# Altium PCB MCU098_MSPM0G3507_PCB.PcbDoc (part 4 of 5)
Units mil, origin at the board's own origin, x right, y up, seen from the top; angles counter-clockwise.
Board outline 2310.03 x 4205.03 mil, 4 copper layers (Top Layer, VCC Layer, GND Layer, Bottom Layer), stack 62.4 mil thick; 260 components, 182 nets, 835 pads, 237 vias.
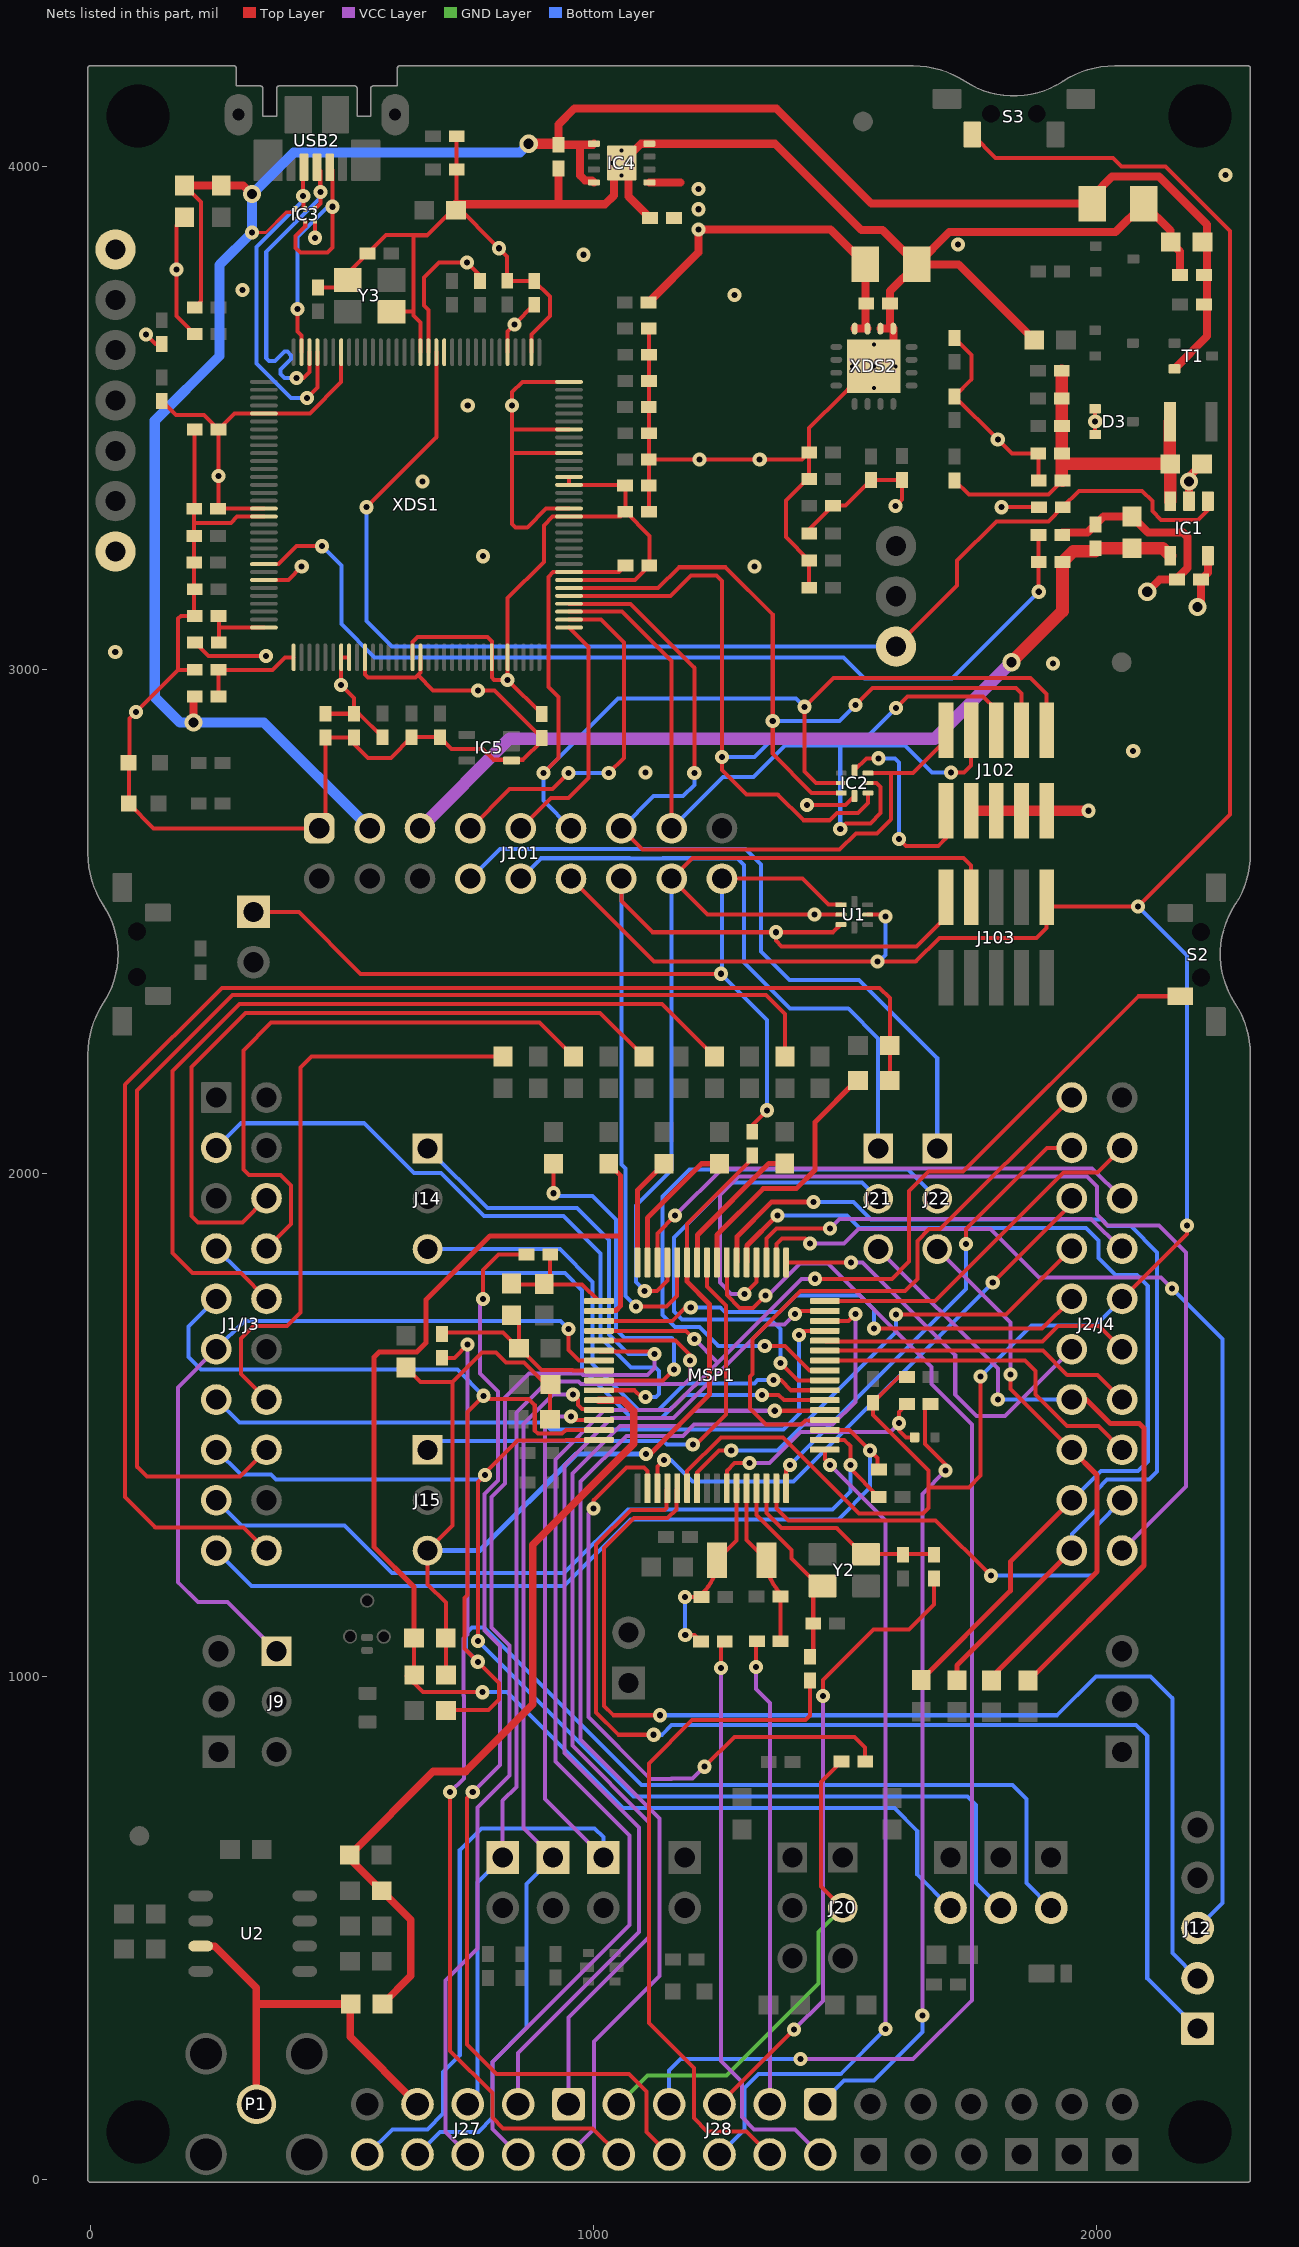
[diagram p5: the nets of this part, all layers, seen from the top]

## Via types
v1: diameter 28, hole 12, Top Layer to Bottom Layer, 211 vias
v2: diameter 36, hole 20, Top Layer to Bottom Layer, 17 vias
v3: diameter 19.68, hole 7.87, Top Layer to Bottom Layer, 9 vias

## Nets (pads, with @x,y where several pads share a name; then routed paths per layer and width w, separated by ;. In a path a pad name is that pad's centre, name@x,y a point inside that pad or via, vN(x,y) a via of type N, cw(c..) or ccw(c..) an arc to the next point about the centre after c; other vN are vias at no path point) (continued)
PA1: MSP1.34 R19.1 | length 1278.6
  Top Layer w8: v1(999.96,1333.33) 999.96,1349.91 1065.04,1414.99 1078.33,1414.99 1078.57,1415.23 1100.26,1415.23 1107.05,1408.44 MSP1.34@1107.05,1373.59 ; v1(1220,820.5) 1279.5,880 1518,880 1539.62,858.38 R19.1@1539.62,830.5
  VCC Layer w8: v1(999.96,1333.33) 990,1323.36 990,919 1112.5,796.5 1154.63,796.5 1154.75,796.62 1196.12,796.62 v1(1220,820.5)
PA1-: J20.2 J28.9 R19.2 | length 991.2
  Top Layer w8: R19.2@1492.38,830.5 1452,790.12 1452,582.88 J20.2@1494.88,540
  GND Layer w8: J28.9@1050,150 1107,207 1264,207 1447,390 1447,492.12 J20.2@1494.88,540
PA2-: J28.1 R9.1 | length 1579
  Top Layer w8: R9.1@1669.62,1541 1658.83,1530.2 1658.83,1461.99 1699.39,1421.43 v1(1699.39,1409)
  VCC Layer w8: v1(1653.02,326.02) 1653.02,1362.63 v1(1699.39,1409)
  Bottom Layer w8: J28.1@1470,170 J28.1@1450,150 1450.8,150 1497.8,197 1557,197 1653.02,293.02 v1(1653.02,326.02)
PA2_ROSC: MSP1.42 R8.1 R9.2 | length 512.1
  Top Layer w8: MSP1.42@1264.53,1373.59 1264.53,1408.53 1280,1424 v1(1310,1424) ; R9.2@1622.38,1541 1607,1525.62 v1(1607,1503) 1607,1489 1621,1475 R8.1@1637.82,1475 R8.1@1638.38,1475
  VCC Layer w8: v1(1310,1424) 1349,1424 1411,1486 1590,1486 v1(1607,1503)
PA3-: J28.2 R10.1 | length 1151.8
  Top Layer w8: v1(1253.03,1017) 1253.03,1060.64 1252.65,1061.02 R10.1@1260.62,1069
  VCC Layer w8: v1(1253.03,1017) 1253.03,236.45 1252.65,236.06 1294.35,194.35 1294.35,124.65 1319,100 1400,100 J28.2@1450,50
PA3_LFXIN: C9.2 MSP1.43 R10.2 Y1.2 | length 390.3
  Top Layer w8: v1(1181.65,1158) C9.2@1214.38,1158 ; v1(1182,1082) 1200.38,1082 R10.2@1213.38,1069 ; C9.2@1208.26,1158.65 ccw(c1155.34,1231) Y1.2@1244.98,1231 1284.21,1270.23 MSP1.43@1284.21,1373.59 MSP1.43@1285.4,1372.4
  Bottom Layer w8: v1(1181.65,1158) 1182,1157.65 v1(1182,1082)
PA4-: J28.3 R11.1 | length 935.8
  Top Layer w8: v1(1322.9,1019) 1322.9,1068.27 R11.1@1324.38,1069.75
  VCC Layer w8: v1(1322.9,1019) 1322.9,974.48 1350,947.38 J28.3@1350,150
  Bottom Layer w8: J28.3@1347,153 J28.3@1350,150
PA4_LFXOUT: C11.2 MSP1.44 R11.2 Y1.1 | length 330.5
  Top Layer w8: MSP1.44@1303.9,1373.59 1303.9,1270.51 Y1.1@1343.4,1231 ccw(c1434.2,1231) C11.2@1378.31,1159.45 ; C11.2@1370.96,1158.65 1370.96,1070.41 R11.2@1371.62,1069.75
PA5-: J28.4 R15.1 | length 1351.7
  Top Layer w8: J28.4@1350,50 1304,96 1225.58,96 1199,122.58 1199,222 1109.62,311.38 1109.62,827.19 1195.43,913 1420.58,913 1430,922.42 R15.1@1430,991.63
PA5_HFXIN: C10.2 MSP1.45 R15.2 Y2.3 | length 394.5
  Top Layer w8: MSP1.45@1323.58,1373.59 1323.58,1320.29 1393,1250.88 1393,1234.33 1446.82,1180.5 1448.05,1180.5 1436.38,1168.83 C10.2@1436.38,1105 1436.38,1045.25 R15.2@1430,1038.87
PA6-: J28.5 R17.1 | length 1262.3
  Top Layer w8: J28.5@1250,150 v1(1398,298) ; v1(1456,961) 1456,993 1556.25,1093.25 1626.75,1093.25 1676.38,1142.88 R17.1@1676.38,1194.38
  VCC Layer w8: v1(1398,298) 1455.35,355.35 1455.35,960.35 v1(1456,961)
PA6_HFXOUT: C12.2 MSP1.46 R17.2 Y2.1 | length 416.4
  Top Layer w8: MSP1.46@1343.27,1373.59 1343.27,1324.73 1372.88,1295.12 1483.04,1295.12 1534.66,1243.5 1674.5,1243.5 R17.2@1676.38,1241.62
PA7_CLK-OUT: J28.6 MSP1.49 | length 1682.5
  Top Layer w8: MSP1.49@1459.41,1450.36 1459.41,1430.59 v1(1470,1420)
  VCC Layer w8: v1(1470,1420) 1580,1310 v1(1580,299)
  Bottom Layer w8: J28.6@1250,50 1300,100 1300,182 1328,210 1491,210 v1(1580,299)
PA8_UART1-TX: J1/J3.4 MSP1.54 | length 1463.6
  Top Layer w8: v1(1334.84,1559.36) 1367.56,1559.36 1378.12,1548.79 MSP1.54@1459.41,1548.79
  Bottom Layer w8: J1/J3.4@250,1850 299,1801 943.19,1801 977.23,1766.97 977.23,1611.32 1075.32,1513.23 1135.02,1513.23 1181.14,1559.36 v1(1334.84,1559.36)
PA9_UART1-RX: J14.3 MSP1.55 | length 1053.4
  Top Layer w8: v1(1357.4,1588.56) 1372.09,1588.56 1392.17,1568.47 MSP1.55@1459.41,1568.47 MSP1.55@1457.5,1566.57
  Bottom Layer w8: J14.3@670,1849 933,1849 998,1784 998,1620.43 1089.33,1529.1 1128.44,1529.1 1181.34,1582 1319.47,1582 1326.03,1588.56 v1(1357.4,1588.56)
PA10_UART0-TX: J21.2 MSP1.56 | length 1006
  Top Layer w8: v1(1371.1,1623) 1405.94,1588.16 MSP1.56@1459.41,1588.16
  Bottom Layer w8: v1(1371.1,1623) 1371.1,1689.75 1351.84,1709 1175.85,1709 1160,1724.85 1160,1871.97 1269.03,1981 1533.39,1981 J21.2@1565.39,1949
PA10_UART0-TX_BP: J2/J4.34 J21.3 R62.2 | length 1299.4
  Top Layer w10: R62.2@1870.5,997.5 2093.39,1220.39 2093.39,1493.28 2084.66,1502 2026.83,1502 1978.83,1550 J2/J4.34@1950,1550
  VCC Layer w8: J21.3@1565.39,1849 1803,1611.39 v1(1803,1550)
  Bottom Layer w8: v1(1803,1550) J2/J4.34@1950,1550
PA10_UART0-TX_XDS: J21.1 J101.10 | length 1208.3
  Bottom Layer w8: J101.10@855.36,2585 J101.10@855,2585 895.51,2625.51 1071.78,2625.51 1072.21,2625.08 1137.79,2625.08 1138.22,2625.51 1285.49,2625.51 1299,2612 1299,2418 1390,2327 1505.91,2327 1565.39,2267.52 J21.1@1565.39,2049
PA11_UART0-RX: J22.2 MSP1.57 | length 1195.9
  Top Layer w8: v1(1340,1656.33) 1380.58,1656.33 1429.06,1607.84 MSP1.57@1459.41,1607.84 MSP1.57@1460.44,1608.87
  Bottom Layer w8: v1(1340,1656.33) 1247.61,1656.33 1209.94,1694 1161.41,1694 1137.28,1718.13 1137.28,1953.27 1190.69,2006.68 1625.04,2006.68 J22.2@1682.72,1949
PA11_UART0-RX_BP: J2/J4.33 J22.3 R63.2 | length 1075.7
  Top Layer w8: v1(1828.25,1599.89) 1828.25,1571.09 1949.34,1450 J2/J4.33@1950,1450
  Top Layer w10: R63.2@1790.84,991.75 1790.84,998.84 2000,1208 2000,1400 J2/J4.33@1950,1450
  VCC Layer w8: J22.3@1682.72,1849 1828.25,1703.47 v1(1828.25,1599.89)
PA11_UART0-RX_XDS: J22.1 J101.8 | length 1404.2
  Bottom Layer w8: J101.8@755,2585 813.84,2643.84 1301.67,2643.84 1332.87,2612.64 1332.87,2440.6 1389.62,2383.85 1527.08,2383.85 1682.72,2228.2 J22.1@1682.72,2049
PA12_CAN-TX: J2/J4.32 MSP1.5 R64.2 | length 1946.6
  Top Layer w10: MSP1.5@1303.9,1822.41 1304.8,1823.32 1304.8,1856.16 1364.64,1916 v1(1365,1916) ; R64.2@1650.84,992.75 1828,1169.91 1828,1228 J2/J4.32@1950,1350
  Bottom Layer w8: v1(1365,1916) 1503.25,1916 1528.4,1890.86 1978.74,1890.86 2003.52,1866.07 2003.52,1831.21 2036.9,1797.83 2079.21,1797.83 2101,1776.03 2101,1427 2081.63,1407.63 2007.63,1407.63 J2/J4.32@1950,1350
PA13_CAN-RX: J2/J4.31 MSP1.6 R65.2 | length 2020.6
  Top Layer w10: MSP1.6@1284.21,1822.41 1285.12,1823.31 1285.12,1874.12 1353.87,1942.87 1436.38,1942.87 v1(1437.13,1942.13) ; R65.2@1721.84,992.25 1721.84,1021.84 J2/J4.31@1950,1250
  Bottom Layer w8: v1(1437.13,1942.13) 1516.36,1942.13 1551.04,1907.44 2009.76,1907.44 2022.36,1894.84 2067.38,1894.84 2119.69,1842.53 2119.69,1407 2103.69,1391 2020.36,1391 2000,1370.64 2000,1332.89 1950,1282.89 J2/J4.31@1950,1250
PA14_TIMH0-C0: J28.7 MSP1.7 | length 2626.2
  Top Layer w8: MSP1.7@1264.53,1822.41 1264.53,1757.47 1290,1732 1316.83,1732 v1(1341.69,1756.86) v1@1341.69,1751.92
  VCC Layer w8: v1(1341.69,1756.86) 1346.64,1756.86 1409.78,1820 1465.67,1820 1671,1614.67 1671,1581 1751.48,1500.52 1751.48,356.48 1635,240 v1(1410.76,240)
  Bottom Layer w8: J28.7@1150,150 1150,217 1173,240 v1(1410.76,240)
PA15-_DAC-OUT: C45.1 J1/J3.30 R55.2 | length 2915.9
  Top Layer w8: J1/J3.30@350,1250 304,1296 129,1296 69,1356 69,2175.5 261.31,2367.81 1568.19,2367.81 1588.53,2347.47 C45.1@1588.53,2253.53 1588.53,2184.09 R55.2@1588.19,2183.75
PA15_DAC-OUT: MSP1.8 R55.1 | length 517.5
  Top Layer w10: MSP1.8@1244.84,1822.41 1244.84,1876.84 1337,1969 1402.68,1969 1439.73,2006.05 1439.73,2101 1522.48,2183.75 R55.1@1525.19,2183.75
PA16_OPA1-OUT_ADC1.1: J15.1 MSP1.9 | length 947.7
  Top Layer w8: v1(1197,1460.41) 1203.17,1460.41 1262.72,1519.96 1262.72,1736.83 1225.16,1774.39 MSP1.9@1225.16,1822.41
  Bottom Layer w8: J15.1@670,1450 690,1470 692.13,1467.87 1138.22,1467.87 1145.68,1460.41 v1(1197,1460.41)
PA17-_ADC1.2: J1/J3.28 R81.1 | length 2500.1
  Top Layer w8: J1/J3.28@350,1450 297.21,1397.21 112.29,1397.21 93,1416.5 93,2164 282.82,2353.81 1342.19,2353.81 1380,2316 R81.1@1380,2231.5
PA17_OPA1-IN-_ADC1.2: MSP1.10 R82.2 | length 287.4
  Top Layer w10: MSP1.10@1205.47,1822.41 1206.38,1823.32 1206.38,1877.02 1348.62,2019.25 R82.2@1379.84,2019.25
PA18-: J8.1 J101.18 R23.1 U1.5 | length 1791.5
  Top Layer w8: J8.1@324.12,2518.97 414.28,2518.97 537.25,2396 v1(1253.01,2396) ; J101.18@1255,2585 1414.56,2585 1466.39,2533.17 U1.5@1491.35,2533.17 ; R23.1@1315.24,2082.16 1315.24,2095.31 v1(1344.68,2124.75)
  Bottom Layer w8: J101.18@1255,2585 1255,2397.99 v1(1253.01,2396) 1344.68,2304.33 v1(1344.68,2124.75)
PA18_OPA1-IN+_ADC1.3_GPAMP-IN-: C46.1 J15.3 MSP1.11 R23.2 R58.2 R61.1 R66.2 R67.2 | length 2273.1
  Top Layer w8: R58.2@627,1613.81 656.12,1584.69 720,1584.69 ; R61.1@706.48,1003.04 C46.1@706.48,1076.28 ; C46.1@706.48,1076.72 706.48,1146.52 670,1183 J15.3@670,1250 720,1300 720,1520.81 720,1584.69 ; R66.2@914.5,1512 R66.2@913.5,1511 913.5,1579 R67.2@914.5,1580 905.16,1580 861.86,1623.3 825.91,1623.3 806.18,1643.03 778.34,1643.03 720,1584.69 ; MSP1.11@1185.79,1822.41 1185.79,1899.11 1315.24,2028.56 R23.2@1315.24,2034.92
  Top Layer w10: v1(1104,1442) 1112.31,1442 1230,1559.69 1230,1740 1185.79,1784.21 MSP1.11@1185.79,1822.41
  Bottom Layer w10: J15.3@670,1250 774,1250 966,1442 v1(1104,1442)
PA19_SWDIO: J101.14 J103.2 MSP1.12 U1.7 | length 1955
  Top Layer w8: J101.14@1055,2585 1055,2540.68 1117.18,2478.5 v1(1362,2478.5) ; v1(1084,1734.69) 1144.69,1734.69 1166.1,1756.1 MSP1.12@1166.1,1822.41 ; U1.7@1491.35,2493.8 1476.05,2478.5 v1(1362,2478.5) ; J103.2@1700,2548.12 1700,2509 1641.5,2450.5 1373.5,2450.5 1362,2462 v1(1362,2478.5)
  Bottom Layer w8: J101.14@1055,2585 1055,2017.39 1063.1,2009.29 1063.1,1755.59 v1(1084,1734.69)
PA20_SWCLK: J101.16 J103.4 MSP1.13 U1.6 | length 1993
  Top Layer w8: v1(1101.5,1765.53) 1125.53,1765.53 1146.42,1786.42 MSP1.13@1146.42,1822.41 ; U1.6@1491.35,2513.49 v1(1439,2513.49) 1226.51,2513.49 J101.16@1155,2585 1196,2626 1735.29,2626 1750,2611.29 J103.4@1750,2548.12
  Bottom Layer w8: v1(1101.5,1765.53) 1083.89,1783.15 1083.89,1935.14 1155,2006.25 J101.16@1155,2585
PA21-: J28.8 R20.1 | length 2245.6
  Top Layer w8: v1(759.86,770) 748,758.14 748,269 807.34,209.66 1070.65,209.66 1105,175.31 1105,95 J28.8@1150,50 ; v1(780,1750.03) 780,1806.97 811.03,1838 R20.1@866.42,1838
  VCC Layer w8: v1(759.86,770) 814,824.14 814,1060.15 783,1091.15 783,1362.41 809.87,1389.28 809.87,1565.72 774.05,1601.54 774.05,1744.08 v1(780,1750.03)
PA21_VREF-: C8.2 MSP1.17 R3.2 R20.2 | length 232.6
  Top Layer w8: C8.2@836.63,1780.5 838.13,1779 977.23,1779 MSP1.17@1010.59,1745.64 ; R3.2@913.66,1793.84 R20.2@913.66,1838
PA22-_ADC0.7: J1/J3.24 R83.1 | length 1197.4
  Top Layer w8: J1/J3.24@350,1850 398.91,1898.91 398.91,1975.01 377.92,1996 315,1996 304,2007 304,2244 359.24,2299.24 892.25,2299.24 R83.1@960,2231.5
PA22_OPA0-OUT_ADC0.7_GPAMP-OUT_COMP2-IN0+: C46.2 J16.2 MSP1.18 R61.2 R84.2 | length 2965
  Top Layer w8: R61.2@628.5,1001.04 661.05,968.5 v1(779,968.5) ; R61.2@643.27,1003.26 C46.2@643.27,1076.5
  Top Layer w10: C46.2@643.27,1076.5 643.27,1177.44 564,1256.7 564,1634.5 574,1644.5 648.64,1644.5 667,1662.86 667,1748.34 793.66,1875.01 1051.99,1875.01 1052.99,1874 ; MSP1.18@1010.59,1725.95 1010.59,1726.86 1044.31,1726.86 1052.99,1735.54 1052.99,1874 ; R84.2@1030,2018.5 1052.99,1995.51 1052.99,1874
  Bottom Layer w8: v1(779,968.5) 828.2,968.5 1058.7,738 1598,738 1643,693 1643,606 J16.2@1709,540
PA23-: J28.10 R22.1 | length 1928.3
  Top Layer w8: R22.1@699,1633.01 723.31,1633.01 v1(749.42,1659.12) ; v1(715,770) 715,256 799,172 799,123.09 820.25,101.84 998.16,101.84 J28.10@1050,50
  VCC Layer w8: v1(715,770) 742.44,797.44 742.44,961.19 741.57,962.06 741.57,1075.31 749.42,1083.15 v1(749.42,1659.12)
PA23_VREF+: C7.1 C8.1 MSP1.24 R22.2 | length 429.5
  Top Layer w8: R22.2@699,1679.62 R22.2@699.32,1679.94 ; R22.2@699,1680.25 701.87,1683.12 820.38,1683.12 C7.1@851.5,1652 ; C8.1@836.63,1717.5 851.5,1702.63 C7.1@851.5,1652 ; C8.1@842,1719.38 C8.1@851.5,1709.87 ; MSP1.24@1010.59,1607.84 958.65,1607.84 957.8,1608.7 896.25,1608.7 852.95,1652 C7.1@851.5,1652
PA24-_ADC0.3: J1/J3.27 R79.1 | length 1179.9
  Top Layer w8: J1/J3.27@350,1550 299.61,1600.39 299.61,1671.35 324.26,1696 391,1696 417.5,1722.5 417.5,2209.5 439.5,2231.5 R79.1@820,2231.5
PA24_OPA0-IN1-_ADC0.3: MSP1.25 R80.2 | length 763.8
  Top Layer w8: v1(920,1959.93) R80.2@920,2018.5 ; MSP1.25@1010.59,1588.16 1070.78,1588.16 1092.24,1588.13 ; 1092.28,1588.16 1138.16,1588.16 v1(1160,1610)
  Bottom Layer w8: v1(920,1959.93) 925.93,1954 998,1954 1044.2,1907.8 1044.2,1720.8 1044.13,1720.72 1044.13,1689.28 1061.11,1672.29 1155.21,1672.29 1160,1667.5 v1(1160,1610)
PA25_OPA0-IN1+_ADC0.2: J1/J3.2 MSP1.26 | length 1375.6
  Top Layer w8: MSP1.26@1010.59,1568.47 1081.53,1568.47 1095,1555 v1(1102.68,1555)
  Bottom Layer w8: J1/J3.2@250,2050 299,2099 543.75,2099 642.75,2000 696.55,2000 782.29,1914.26 940.37,1914.26 1014.07,1840.56 1014.07,1673.25 1063.04,1624.28 1063.57,1624.28 1074.13,1613.72 1123.28,1613.72 1130,1607 1130,1561 1124,1555 v1(1102.68,1555)
PA26_OPA0-IN0+_GPAMP-IN+_COMP0-IN0+: J1/J3.5 J18.2 MSP1.30 R57.1 | length 3414.5
  Top Layer w8: R57.1@692.16,937.39 692.16,933 791,933 812,954 812,986.82 743.05,1055.78 743.05,1156.13 749,1162.08 749,1525 v1(781.5,1557.5) 787.7,1551.3 870.6,1551.3 883,1538.9 883,1488.97 889.67,1482.3 937.32,1482.3 944.76,1489.73 MSP1.30@1010.59,1489.73
  Bottom Layer w8: J1/J3.5@227.51,1750 J1/J3.5@250,1750 195.25,1695.25 195.25,1634.16 219.92,1609.49 729.51,1609.49 v1(781.5,1557.5) ; v1(769.82,1029) 746.21,1052.61 746.21,1084.88 758.33,1097 782.5,1097 1095.5,784 1832,784 1860,756 1860,589 J18.2@1909,540
PA27_OPA0-IN0-_COMP0-IN0-_TIMA2_FAL: J1/J3.8 J17.2 MSP1.31 | length 2505.3
  Top Layer w8: v1(770.21,1070) 770.21,1386.21 v1(784,1400) 784,1403.97 848.33,1468.3 943.12,1468.3 944.87,1470.05 MSP1.31@1010.59,1470.05
  Bottom Layer w8: J1/J3.8@250,1450 299.03,1400.97 358.97,1400.97 368.94,1391 652.45,1391 652.85,1391.4 687.15,1391.4 687.55,1391 775,1391 v1(784,1400) ; v1(770.21,1070) 1079.21,761 1743,761 1760,744 1760,589 J17.2@1809,540
PA28_TIMA2_C0: J2/J4.38 MSP1.35 | length 1128.9
  Top Layer w8: MSP1.35@1126.73,1373.59 1126.73,1416.73 v1(1140,1430) ; v1(1793.04,1782.83) 1950,1939.79 J2/J4.38@1950,1950
  Bottom Layer w8: v1(1140,1430) 1153.62,1430 1196.59,1387.03 1397.24,1387.03 v1(1793.04,1782.83)
PA29_TIMG10_C0: J12.1 MSP1.36 | length 2295.9
  Top Layer w8: v1(1119.38,884) 1049.27,884 1005.13,928.15 1005.13,1261.58 1073.99,1330.44 1140.45,1330.44 1144.51,1334.5 1144.51,1371.69 MSP1.36@1146.42,1373.59
  Bottom Layer w8: v1(1119.38,884) 1136,884 1155,903 1160.62,903 2078,903 2086.65,894.35 2087.4,894.35 2100,881.75 2100,400 J12.1@2200,300
PA30_TIMG10_C1: J12.2 MSP1.37 | length 2295.1
  Top Layer w8: v1(1132,922.75) 1039.73,922.75 1021,941.48 1021,1255 1080.56,1314.56 1147.02,1314.56 1164.2,1331.74 1164.2,1371.68 MSP1.37@1166.1,1373.59
  Bottom Layer w8: v1(1132,922.75) 1920.82,922.75 1998.07,1000 2106.5,1000 2150,956.5 2150,450 J12.2@2200,400
PA31_TIMA2_C1: J2/J4.37 MSP1.39 | length 980.5
  Top Layer w8: MSP1.39@1205.47,1373.59 1205.47,1404.99 1249.48,1449 v1(1273.42,1449) ; v1(1600.5,1719.11) 1819.11,1719.11 J2/J4.37@1950,1850
  Bottom Layer w8: v1(1273.42,1449) 1365,1449 1600.5,1684.5 v1(1600.5,1719.11)
PB0_SPI1-CS2: J2/J4.12 MSP1.47 | length 898.3
  Top Layer w8: MSP1.47@1362.95,1373.59 1362.95,1333.77 1386.72,1310 1679.72,1310 v1(1789.72,1200)
  Bottom Layer w8: v1(1789.72,1200) 1992,1200 2000,1208 2000,1300 J2/J4.12@2050,1350
PB1_TIMA1-C1: J2/J4.39 MSP1.48 | length 941.3
  Top Layer w8: MSP1.48@1382.64,1373.59 1382.64,1412.55 v1(1390,1419.92) ; v1(1739.48,1859) 1739.48,1888.79 1900.69,2050 J2/J4.39@1950,2050
  Bottom Layer w8: v1(1390,1419.92) 1739.48,1769.4 v1(1739.48,1859) v1@1739.48,1860
PB2_I2C1-SCL: J1/J3.9 MSP1.50 R59.2 | length 1620.2
  Top Layer w8: MSP1.50@1459.41,1470.05 1497.95,1470.05 1510,1458 v1(1510,1419.92) 1510,1412.72 R59.2@1566.38,1356.35
  Bottom Layer w8: J1/J3.9@250,1350 300,1300 504.84,1300 599.84,1205 941.52,1205 1068.52,1332 1474.28,1332 1510,1367.72 v1(1510,1419.92)
PB3_I2C1-SDA: J1/J3.10 MSP1.51 R60.2 | length 1630.6
  Top Layer w8: MSP1.51@1459.41,1489.73 1508.62,1489.73 v1(1549.35,1449) 1564.09,1434.26 R60.2@1564.09,1414.34
  Bottom Layer w8: J1/J3.10@250,1250 320.13,1179.87 940.96,1179.87 1073.18,1312.09 1486.09,1312.09 1549.35,1375.35 v1(1549.35,1449)
PB4_TIMA1-C0: J2/J4.40 MSP1.52 | length 1183
  Top Layer w8: MSP1.52@1459.41,1509.42 1458.62,1508.63 1421,1508.63 1412.37,1500 1342.85,1500 1310.84,1532.02 1310.84,1595.49 1316,1600.65 1316,1669.98 1411.29,1765.28 1618.78,1765.28 1643.19,1789.69 1643.19,1865.37 1666.35,1888.53 1688.53,1888.53 J2/J4.40@1950,2150
PB5: J27.1 MSP1.53 | length 1936
  Top Layer w8: v1(1359.9,1527.77) 1458.08,1527.77 MSP1.53@1459.41,1529.1
  VCC Layer w8: J27.1@950,150 950,322 1109.96,481.96 1109.96,710.04 957.76,862.24 957.76,1402.76 1052.35,1497.35 1167.65,1497.35 1198.08,1527.77 v1(1359.9,1527.77)
PB6_SPI1-CS0: J2/J4.13 MSP1.58 | length 691.7
  Top Layer w8: MSP1.58@1459.41,1627.53 1857.47,1627.53 1878,1607 1878,1560 1941,1497 2003,1497 J2/J4.13@2050,1450
PB7_SPI1-POCI: J2/J4.14 MSP1.59 | length 630.9
  Top Layer w8: MSP1.59@1459.41,1647.21 1892.81,1647.21 1941.02,1599 2001,1599 J2/J4.14@2050,1550
PB8_SPI1-PICO: J2/J4.15 MSP1.60 | length 623.2
  Top Layer w8: MSP1.60@1459.41,1666.9 1461.18,1665.13 1891.63,1665.13 1922.5,1696 2004,1696 J2/J4.15@2050,1650
PB9_SPI1-SCK: J1/J3.7 MSP1.61 | length 1408.9
  Top Layer w8: v1(1408,1678) 1416.58,1686.58 MSP1.61@1459.41,1686.58
  Bottom Layer w8: J1/J3.7@250,1550 296,1504 900.43,1504 913.95,1490.48 1377.48,1490.48 1410,1523 1408,1525 v1(1408,1678)
PB10_TIMG0-C0: J27.2 MSP1.62 | length 2329.7
  Top Layer w8: MSP1.62@1459.41,1706.27 1506.27,1706.27 v1(1520,1720)
  VCC Layer w8: J27.2@950,50 1000.49,100.49 1000.49,274.49 1130.54,404.54 1130.54,717.99 973.63,874.91 973.63,1386.77 1064.86,1478 1177.16,1478 1199.16,1500 1474.9,1500 1520,1545.1 v1(1520,1720)
PB11_TIMG0-C1: J27.3 MSP1.63 | length 2074.6
  Top Layer w8: v1(1399.96,1720) 1405.91,1725.95 MSP1.63@1459.41,1725.95
  VCC Layer w8: J27.3@850,150 850,252.03 1090,492.03 1090,699.52 941.88,847.63 941.88,1419.3 1035.8,1513.22 1158.63,1513.22 1344.44,1699.04 1378.99,1699.04 v1(1399.96,1720)
PB12_TIMA0-C2_TIMA1-FAL: J2/J4.19 MSP1.64 | length 716.7
  Top Layer w8: MSP1.64@1459.41,1745.64 1678.64,1745.64 1934,2001 2001,2001 J2/J4.19@2050,2050
PB13_TIMA0-C3: J2/J4.35 MSP1.1 | length 794.1
  Top Layer w8: MSP1.1@1382.64,1822.41 v1(1511.63,1822.41)
  VCC Layer w8: v1(1511.63,1822.41) 1534.42,1822.41 1718.49,1638.34 1718.49,1560.23 1760.98,1517.74 1817.74,1517.74 J2/J4.35@1950,1650
PB14_TIMG10_IDX: J12.3 MSP1.2 | length 2225.1
  Top Layer w8: MSP1.2@1362.95,1822.41 1362.95,1858.9 1373.92,1869.87 1420.25,1869.87 v1(1430,1860.12)
  VCC Layer w8: v1(1430,1860.12) 1497.66,1860.12 1526.07,1888.53 1788.77,1888.53 1884.91,1792.39 2127.7,1792.39 v1(2149.08,1771)
  Bottom Layer w8: v1(2149.08,1771) 2249.92,1670.16 2249.92,549.92 J12.3@2200,500
PB15_UART2-TX_TIMG1-C0: J2/J4.17 MSP1.3 | length 794.8
  Top Layer w8: MSP1.3@1343.27,1822.41 1343.27,1869.87 1363.52,1890.13 v1(1469.76,1890.13)
  VCC Layer w8: v1(1469.76,1890.13) 1488.63,1909 1988.4,1909 2047.4,1850 J2/J4.17@2050,1850
PB16_UART2-RX_TIMG1-C1: J2/J4.11 MSP1.4 | length 1986
  Top Layer w8: v1(1300,1759.93) 1323.58,1783.51 MSP1.4@1323.58,1822.41
  VCC Layer w8: v1(1300,1759.93) 1273.42,1759.93 1251.22,1782.14 1251.22,1956.22 1288.32,1993.32 1980.09,1993.32 1999.82,1973.59 1999.82,1917.38 2021.03,1896.18 2123.34,1896.18 2177,1842.52 2177,1377 J2/J4.11@2050,1250
PB17_ADC1.4_SPI1-CS1: J2/J4.18 MSP1.14 | length 1059.3
  Top Layer w8: MSP1.14@1126.73,1822.41 1126.73,1880.31 v1(1162,1915.58)
  VCC Layer w8: v1(1162,1915.58) 1255.89,2009.47 1990.53,2009.47 J2/J4.18@2050,1950
PB18-_ADC1.5: J1/J3.25 R75.1 | length 1761.9
  Top Layer w8: J1/J3.25@350,1750 299,1801 203.27,1801 163,1841.27 163,2203 296,2336 1135.5,2336 R75.1@1240,2231.5
PB18_ADC1.5: MSP1.15 R76.2 | length 276.1
  Top Layer w10: MSP1.15@1107.05,1822.41 1107.05,1911.05 1214.5,2018.5 R76.2@1250,2018.5
PB19-_ADC1.6: J1/J3.23 R77.1 | length 1449.8
  Top Layer w8: J1/J3.23@350,1950 302,1902 214,1902 201,1915 201,2211 308.45,2318.45 1013.05,2318.45 R77.1@1100,2231.5
PB19_OPA1-IN+_ADC1.6: MSP1.16 R78.2 | length 217.9
  Top Layer w10: MSP1.16@1087.36,1822.41 1087.36,1965.87 R78.2@1140,2018.5
PB20_TIMA0-C2: J2/J4.36 MSP1.19 | length 1041.6
  Top Layer w8: MSP1.19@1010.59,1706.27 1156.2,1706.27 1182.93,1733 v1(1193,1733) ; v1(1557,1691) 1891,1691 J2/J4.36@1950,1750
  Bottom Layer w8: v1(1193,1733) 1251.58,1733 1260.71,1723.87 1369.18,1723.87 1401.84,1756.54 1529.46,1756.54 1557,1729 v1(1557,1691)
PB21: J27.4 MSP1.20 S2.3 | length 3542.8
  Top Layer w8: MSP1.20@1010.59,1686.58 1183.42,1686.58 v1(1200,1670) ; v1(1440,1790) 1592.89,1790 1626.9,1824.02 1626.9,1964.22 1665.53,2002.84 1734.16,2002.84 2082.65,2351.32 S2.3@2165.44,2351.32
  VCC Layer w8: J27.4@850,50 799,101 799,234 1071,506 1071,684 923.97,831.03 923.97,1430.97 1022.09,1529.09 1152.05,1529.09 1246.98,1624.02 ; v1(1200,1670) 1245.98,1624.02 1246.98,1624.02 ; v1(1440,1790) 1412.96,1790 1246.98,1624.02
PB22: J5.1 J27.5 MSP1.21 | length 2029.8
  Top Layer w8: MSP1.21@1010.59,1666.9 1162.52,1666.9 1191.28,1638.14 v1(1191.28,1628)
  VCC Layer w8: J5.1@819.38,640 819.38,752.88 847.03,780.53 847.03,1524.5 908.4,1585.87 969.72,1585.87 974.69,1580.91 1180.24,1580.91 1191.28,1591.94 v1(1191.28,1628)
  Bottom Layer w8: J27.5@750,150 769.66,169.66 769.66,590.28 J5.1@819.38,640
PB23_TIMA0-FAL: J14.1 J27.6 MSP1.22 | length 2794.6
  Top Layer w8: MSP1.22@1010.59,1647.21 1012.5,1645.31 1115.43,1645.31 v1(1120.58,1640.16)
  VCC Layer w8: J27.6@750,50 705.65,94.35 705.65,168.73 706,169.08 706,395.79 769.38,459.17 769.38,739.47 833.03,803.12 833.03,1060.92 797,1096.95 797,1356.61 823.87,1383.48 823.87,1553.66 871.97,1601.75 976.29,1601.75 979.04,1599 1107.22,1599 1120.58,1612.37 v1(1120.58,1640.16)
  Bottom Layer w8: J14.1@670,2049 788.87,1930.13 966.96,1930.13 1030.2,1866.89 1030.2,1726.59 1030.13,1726.52 1030.13,1679.64 1069.61,1640.16 v1(1120.58,1640.16)
PB24_ADC0.5_COMP1-IN1+: J1/J3.6 J9.1 MSP1.23 | length 1587.9
  Top Layer w8: v1(950,1690) 950,1648.83 971.3,1627.53 MSP1.23@1010.59,1627.53
  VCC Layer w8: J1/J3.6@250,1650 174,1574 174,1187 213.5,1147.5 272.5,1147.5 J9.1@370,1050
  Bottom Layer w8: J1/J3.6@250,1650 306.27,1706.27 933.73,1706.27 v1(950,1690)
PB25-: J27.7 P1.1 R74.1 U2.3 | length 819.1
  Top Layer w15: U2.3@219.32,463.99 247.01,463.99 330,381 330,352 ; P1.1@330,150 330,352 ; R74.1@517.5,349 R74.1@516.41,349 ; J27.7@650,150 516.41,283.59 R74.1@516.41,349 ; 330,352 333,349 R74.1@516.41,349
PB25_ADC0.4_TIMA2-FAL: C47.1 MSP1.27 R72.2 R74.2 | length 1601.5
  Top Layer w15: R74.2@580.5,349 637.01,405.51 637.01,515.98 R72.2@579,573.99 515.51,637.48 C47.1@515.51,644.99 681.52,811 745.48,811 879.45,944.97 879.45,1261.22 1080,1461.76 1080,1527 1058.21,1548.79 MSP1.27@1010.59,1548.79
PB26: J6.1 J27.8 MSP1.28 | length 1826.1
  Top Layer w8: v1(959,1560) 969.19,1549.81 969.19,1539.11 977.29,1531.01 991.09,1531.01 991.09,1529.1 MSP1.28@1010.59,1529.1
  VCC Layer w8: J6.1@919.38,640 861.03,698.35 861.03,1501.88 919.34,1560.19 919.53,1560 v1(959,1560)
  Bottom Layer w8: J27.8@650,50 694.98,94.98 770.89,94.98 799,123.09 799,234 867,302 867,587.62 J6.1@919.38,640
PB27: J7.1 J27.10 MSP1.29 | length 2105.7
  Top Layer w8: v1(955.35,1516.35) 955.35,1514.2 960.13,1509.42 MSP1.29@1010.59,1509.42
  VCC Layer w8: v1(955.35,1516.35) 909.14,1516.35 902.91,1510.12 902.91,756.47 J7.1@1019.38,640
  Bottom Layer w8: J27.10@550,50 600.13,100.13 670,100.13 701,131.13 701,214.21 734,247.21 734,654.62 777.38,698 1002,698 1019.38,680.62 J7.1@1019.38,640
R\S\T\: C6.1 J2/J4.16 J101.12 J103.10 MSP1.38 R2.1 S3.4 U1.2 | length 5908.3
  Top Layer w8: J101.12@955,2585 1120.08,2419.92 1242.99,2419.92 1243.07,2420 v1(1564.09,2420) 1640,2420 1687,2467 1880,2467 1900,2487 J103.10@1900,2530 ; MSP1.38@1185.79,1373.59 1185.79,1407.75 1253.03,1475 1376.69,1475 1527.69,1324 1654.64,1324 1665.49,1334.85 1665.49,1375.35 ; U1.2@1544.5,2513.49 1576.39,2513.49 v1(1579.88,2510) ; C6.1@1622.38,1595 1606.24,1595 R2.1@1555,1543.76 1555,1519.62 1665.49,1409.13 1665.49,1375.35 ; S3.4@1752.32,4063.44 1798.76,4017 2031.55,4017 2048.68,3999.87 2136.13,3999.87 2264.13,3871.87 2264.13,2712.63 v1(2081.5,2530) J103.10@1900,2530 ; v1(1769,1596) 1769,1398.68 1745.67,1375.35 1665.49,1375.35 ; J103.10@1900,2548.12 J103.10@1900,2530 ; J2/J4.16@2050,1750 2179.06,1879.06 v1(2179.06,1895.44)
  Bottom Layer w8: v1(1564.09,2420) 1566.38,2420 1579.88,2433.5 v1(1579.88,2510) ; v1(1769,1596) 1870,1697 1997,1697 J2/J4.16@2050,1750 ; v1(2081.5,2530) 2179.06,2432.44 v1(2179.06,1895.44)
REF_MAIN_LDO: R51.1 R54.2 XDS1.128 | length 143.9
  Top Layer w8: R54.2@254.62,3107 255.24,3106.38 255.24,3086.5 ; R51.1@255.24,3054 255.24,3086.5 ; XDS1.128@344.85,3083.91 257.84,3083.91 255.24,3086.5
REF_TARGET_VCC: R50.1 R53.2 XDS1.120 | length 1915.4
  Top Layer w8: XDS1.120@344.85,3209.89 373.97,3209.89 409.58,3245.5 v1(460,3245.5) ; R53.2@1884,3268 1884,3214.38 R50.1@1884.38,3214 v1(1884.38,3155)
  Bottom Layer w8: v1(460,3245.5) 498.64,3206.86 498.64,3090.77 564.56,3024.85 1496.15,3024.85 1538,2983 1712.38,2983 v1(1884.38,3155)
VBUS_DETECT: R87.2 R88.2 XDS1.1 | length 212.5
  Top Layer w8: R87.2@254.62,2947 R88.2@254.62,3000 361.65,3000 386.5,3024.85 XDS1.1@403.84,3024.85
VCCEN1: IC1.1 R49.2 TP2.1 XDS1.78 | length 2503.4
  Top Layer w8: v1(548.34,3323) 687.37,3462.03 XDS1.78@687.37,3631.15 ; TP2.1@1601,3046 1722,3167 1722,3217 1800,3295 1904,3295 R49.2@1932,3323 1964,3355 2090,3355 2110,3335 2110,3315 2127,3298 2201,3298 2220.4,3317.4 IC1.1@2220.4,3335
  Bottom Layer w8: v1(548.34,3323) 548.34,3096.66 599,3046 TP2.1@1601,3046
VCCEN2: XDS1.77
XDS_DM: IC3.5 USB2.2 XDS1.93 | length 683.3
  Top Layer w8: USB2.2@424.5,3998.28 423,3996.78 v1(423,3941) 423.13,3940.87 423.13,3919.69 IC3.5@427,3915.81 ; v1(430.17,3540.08) 451.15,3561.06 XDS1.93@451.15,3631.15
  Bottom Layer w8: v1(423,3941) 423,3932.88 330.47,3840.34 330.47,3608.66 399.05,3540.08 v1(430.17,3540.08)
XDS_DP: IC3.4 USB2.3 XDS1.94 | length 684.8
  Top Layer w8: v1(410.02,3580) 423.55,3580 435.4,3591.85 XDS1.94@435.4,3631.15 ; IC3.4@446.69,3915.81 457,3926.13 v1(457,3949.4) 456.82,3949.58 456.82,3990.98 455.56,3992.24 449.81,3997.99 USB2.3@450.09,3998.28 USB2.3@454.95,3993.42
  Bottom Layer w8: v1(410.02,3580) 385.64,3580 377.64,3588 377.64,3596.37 399.05,3617.77 399.05,3624.75 391.28,3632.52 385.37,3632.52 366.66,3613.81 355.38,3613.81 349.51,3619.68 349.51,3830.51 457,3938 v1(457,3949.4)
XDS_GND: C13.2 C14.2 C15.2 C16.2 C17.2 C18.2 C19.2 C20.2 C21.2 C22.2 C23.2 C24.2 C25.2 C26.2 C27.2 C28.2 C29.2 C30.2 C31.2 C32.2 C33.2 C34.2 C35.2 C36.2 C37.1 C38.2 C39.2 C40.2 C41.2 C42.2 C43.1 C44.2 C53.2 C54.2 C55.2 C56.2 D3.1 D3.2 IC1.2 IC2.4 IC3.3 IC4.4 IC4.9 IC5.1 J101.1 J102.3 J102.5 J102.7 J102.9 LED101.2 LED102.2 R24.2 R25.2 R26.2 R27.2 R32.1 R37.1 R44.1 R46.1 R49.1 R52.1 R53.1 R54.1 R86.2 R88.1 R90.1 TP4.1 XDS1.10 XDS1.17 XDS1.48 XDS1.55 XDS1.58 XDS1.64 XDS1.66 XDS1.80 XDS1.114 XDS2.13 XDS2.14 XDS2.17 Y3.2 Y3.4 | length 9950.1
  Top Layer w8: C53.2@187,3899.23 171,3883.23 v1(171,3795) 171,3703.38 C13.2@207.38,3667 ; R88.1@207.38,3000 174.5,3000 ; C18.2@207.38,3477.61 207.38,3321 C19.2@206.38,3320 206.38,3292 ; XDS1.114@344.85,3304.38 291.59,3304.38 279.21,3292 206.38,3292 ; v1(446.69,3858.31) IC3.3@446.69,3892.19 ; C30.2@452.72,3759.62 496.82,3759.62 Y3.4@511.69,3774.5 511.69,3787.9 C29.2@550.75,3826.97 587.18,3863.39 642.22,3863.39 ; XDS1.10@545.64,3024.85 545.64,2990.66 551.91,2984.39 645.68,2984.39 650.78,2989.49 ; Y3.2@598.31,3711.5 639.98,3711.5 642.22,3713.74 ; XDS1.17@655.87,3024.85 655.87,2994.58 650.78,2989.49 ; XDS1.80@655.87,3631.15 655.87,3690.2 642.22,3703.85 642.22,3713.74 ; C54.2@728,4060 728,3928.5 R86.2@724.5,3925 ; XDS1.66@876.35,3631.15 876.35,3666.02 913,3702.68 913,3741.62 C14.2@882,3772.62 828,3772.62 828,3821.5 v1(812,3837.5) R86.2@724.5,3925 ; XDS1.48@951.15,3320.13 905.45,3320.13 868.12,3282.79 844.96,3282.79 838,3289.75 838,3431 ; XDS1.55@951.15,3430.36 838.64,3430.36 838,3431 ; XDS1.58@951.15,3477.61 838.61,3477.61 838,3477 ; XDS1.64@951.15,3572.22 858.22,3572.22 838,3552 v1(838,3525) 838,3477 ; C28.2@1109.62,3678 R26.2@1109.62,3522 R32.1@1109.62,3418 ; C15.2@1110.13,3314 1110.13,3365.5 C16.2@1109.62,3366 R32.1@1109.62,3418 ; v1(1423.8,2731.35) 1500.62,2731.35 IC2.4@1518.56,2749.29 ; R46.1@1428.38,3163 C35.2@1428.38,3217 1382,3263.38 1382,3336.5 1424.5,3379 R44.1@1428.38,3379 C34.2@1428.38,3432 ; v3(1557,3603) 1551.41,3603 1505.88,3557.47 1505.88,3557.25 1495.47,3546.83 1495.24,3546.83 1428.38,3479.97 C34.2@1428.38,3432 ; C31.2@1717,3659.24 1751,3625.24 1751,3577.24 R37.1@1717,3543.24 v1(1803,3457.24) 1830.89,3429.35 C42.2@1883.38,3429.35 1884.38,3428.35 C44.2@1884.38,3376 ; v1(1810.75,3323) R49.1@1884.76,3323 ; D3.2@1996.6,3467.41 v1(1996.6,3493) D3.1@1996.6,3518.59 ; 174.5,3000 v1(90.5,2916) 77.59,2903.09 77.59,2815.41 76.47,2814.29 LED102.2@76.47,2734 125.47,2685 J101.1@455,2685 467.5,2697.5 C17.2@467.5,2865.38 C21.2@524,2865.38 524,2853 552,2825 596.99,2825 C26.2@638,2866.01 C27.2@695,2866.01 718.01,2843 779,2843 800.75,2821.25 834.95,2821.25 IC5.1@836.63,2819.57 838.32,2821.25 859.29,2821.25 897,2858.96 C22.2@897,2864.76 802.76,2959 v1(770,2959) 681.27,2959 650.78,2989.49 ; 174.5,3000 174.5,3101.5 180,3107 R54.1@207.38,3107 206.38,3108 C24.2@206.38,3213 C23.2@206.38,3266 206.38,3292 ; 642.22,3713.74 642.22,3863.34 669.23,3863.34 724.5,3918.62 R86.2@724.5,3925 ; 838,3431 838,3477 ; R32.1@1109.62,3418 v1(1210,3418) v1(1330,3418) 1414.38,3418 C34.2@1428.38,3432
  Top Layer w16: R86.2@724.5,3925 930,3925 ; C55.2@930,3995.95 930,3925 ; C56.2@1112.1,3897.58 1069,3940.68 1069,3993.39 IC4.9@1055.61,4006.78 ; v3(1557,3603) 1595.39,3641.39 XDS2.13@1595.39,3677.8 1586,3677.8 ; XDS2.14@1569.8,3677.8 1586,3677.8 ; R52.1@1875.5,3655.41 1725.34,3805.58 C32.2@1642.2,3805.58 ; R53.1@1931.24,3268 1931.24,3273 1981.38,3273 C39.2@1997,3288.62 2012.87,3304.5 C40.2@2070,3304.5 2101.5,3273 2171,3273 2180,3264 2180,3202.39 2159.38,3181.76 C41.2@2159.38,3179 2124,3179 v2(2100,3155) ; C38.2@2165.38,3784 2165.38,3830.99 C37.1@2146.5,3849.87 2146.5,3872.68 C36.2@2093.18,3926 2037.1,3869.92 1706.54,3869.92 C32.2@1642.2,3805.58 ; IC1.2@2183,3335 v2(2183,3374) 2183,3383.5 C43.1@2208.5,3409 ; 930,3925 1022.77,3925 1040.25,3942.49 1040.25,3991.43 IC4.9@1055.61,4006.78 ; IC4.9@1055.61,4006.78 1093.99,4045.17 IC4.4@1110.73,4045.17 1360.63,4045.17 1531.8,3874 1573.77,3874 C32.2@1642.2,3805.58 ; 1586,3677.8 1589,3680.8 C33.2@1589,3728 1589,3752.38 C32.2@1642.2,3805.58
  Top Layer w20: J102.3@1750,2719.88 J102.5@1800,2719.88 J102.7@1850,2719.88 J102.9@1900,2719.88 v1(1983.12,2719.88)
  other v1: 1102.68,2795.97 2072.1,2838.95 1912.66,3012.25 49.5,3035 1320,3205.04 780.01,3225.64 660,3374.32 749.88,3524.85 1280,3744.87 301.95,3754.84 979.85,3824.59 1724.24,3845.17 2255.75,3983.3
  other v3: 1557,3559.69 1513.69,3603 1600.31,3603 1557,3646.31 1055.61,3982.17 1035.92,4006.78 1075.29,4006.78 1055.61,4031.39
XDS_ID: IC3.2 USB2.4 XDS1.95 | length 630.1
  Top Layer w8: v1(412,3717.02) 412,3671.85 419.65,3664.2 XDS1.95@419.65,3631.15 ; IC3.2@427,3892.19 427,3880.9 408.04,3861.94 408.04,3838.4 417.44,3829 470.93,3829 481,3839.07 v1(481,3920) 481,3992.96 USB2.4@475.68,3998.28
  Bottom Layer w8: v1(412,3717.02) 412,3860.22 471.78,3920 v1(481,3920)
XDS_RESET_OUT: IC2.2 J101.11 J102.10 R85.1 XDS1.40 | length 2094.2
  Top Layer w8: v1(900,2794.5) 930,2824.5 930,2945.5 910,2965.5 910,3184.5 919.65,3194.14 XDS1.40@951.15,3194.14 1050.52,3194.14 R85.1@1063.38,3207 ; IC2.2@1491.99,2774.88 1442.09,2774.88 1418.72,2798.25 v1(1418.72,2926.46) 1476.26,2984 1868,2984 1900,2952 J102.10@1900,2880.12
  Bottom Layer w8: J101.11@955,2685 900,2740 v1(900,2794.5) 1048.5,2943 1402.18,2943 v1(1418.72,2926.46)
XDS_RXD: J101.9 XDS1.33 | length 491.4
  Top Layer w8: J101.9@855,2685 915,2745 950.09,2745 990,2784.91 990,3044.99 951.21,3083.78 XDS1.33@951.15,3083.78
XDS_TCK_SWDCLK: IC2.6 J101.15 J102.4 XDS1.35 | length 1676.4
  Top Layer w8: XDS1.35@951.15,3115.4 1056.6,3115.4 1155,3017 J101.15@1155,2685 ; v1(1490,2684) 1500.93,2694.93 1549.85,2694.93 1570,2715.08 1570,2767 1562.12,2774.88 IC2.6@1545.14,2774.88 ; v1(1710,2796) 1736,2796 1750,2810 J102.4@1750,2880.12
  Bottom Layer w8: J101.15@1155,2685 1257,2787 1317.62,2787 1380.23,2849.61 1490,2849.61 ; v1(1490,2684) 1490,2849.61 ; v1(1710,2796) 1672,2796 1618.39,2849.61 1490,2849.61
XDS_TDI: IC2.3 J102.8 XDS1.38 | length 1505.7
  Top Layer w8: XDS1.38@951.15,3162.65 1128.16,3162.65 1169.2,3203.68 1262.15,3203.68 1355.89,3109.95 v1(1355.89,2898.31) 1355.89,2834.08 1355,2833.2 1432.85,2755.35 1491.83,2755.35 IC2.3@1491.99,2755.19 ; v1(1520.04,2930) 1554.04,2964 1839,2964 1850,2953 J102.8@1850,2880.12
  Bottom Layer w8: v1(1355.89,2898.31) 1488.35,2898.31 v1(1520.04,2930)
XDS_TDO_SWO: IC2.5 J102.6 XDS1.37 | length 1713
  Top Layer w8: XDS1.37@951.15,3146.9 1038.1,3146.9 ; 1038.1,3146.77 1152.8,3146.77 1193.68,3187.65 1243.88,3187.65 1255,3176.53 v1(1255,2827) 1255,2800.97 1303.97,2752 1365.81,2752 1416.7,2701.11 1416.59,2701 1469,2701 1483.31,2715.31 1525.31,2715.31 1545.14,2735.14 IC2.5@1545.14,2755.19 ; v1(1601,2924) 1623.85,2946.85 1773.94,2946.85 1800,2920.79 J102.6@1800,2880.12
  Bottom Layer w8: v1(1255,2827) 1319.83,2827 1359.17,2866.34 1543.34,2866.34 v1(1601,2924)
XDS_TMS_SWDIO: IC2.7 J101.13 J102.2 XDS1.36 | length 1587.2
  Top Layer w8: XDS1.36@951.15,3131.15 1072.85,3131.15 ; J101.13@1055,2685 1097.39,2642.61 1488.61,2642.61 1521,2675 1563,2675 1591,2703 1591,2794.56 ; 1072.85,3130.9 1073.1,3130.9 1200,3004 v1(1200,2795) ; IC2.7@1545.14,2794.56 1591,2794.56 ; J102.2@1700,2880.12 1700,2860 1634.56,2794.56 1591,2794.56
  Bottom Layer w8: J101.13@1055,2685 1119,2749 1177.96,2749 1200,2771.04 v1(1200,2795)
XDS_TXD: J101.7 XDS1.34 | length 719.8
  Top Layer w8: J101.7@755,2685 833,2763 918,2763 v1(950,2795) ; XDS1.34@951.15,3099.65 1014.6,3099.65 ; 1014.6,3099.53 1014.73,3099.53 1060,3054.25 1060,2825 v1(1030,2795)
  Bottom Layer w8: v1(950,2795) v1(1030,2795)
XDS_VBUS: C36.1 C37.2 C38.1 C53.1 C55.1 IC3.6 IC4.5 IC4.8 J101.3 R28.1 R48.2 R87.1 R89.2 T1.2 | length 4797
  Top Layer w6: v1(321,3869) 349,3869 389.06,3909.06 400.57,3909.06 IC3.6@407.32,3915.81
  Top Layer w8: C53.1@187,3962.22 220,3929.22 220,3732.62 R28.1@207.38,3720
  Top Layer w16: C53.1@187,3962.22 R89.2@260,3962.22 303.78,3962.22 v2(321,3945) ; v2(205,2895) 205,2944.62 R87.1@207.38,2947 ; C55.1@928.03,4045.17 C55.1@930,4043.2 ; IC4.8@1000.49,3968.39 996.88,3972.01 983.25,3972.01 972.8,3982.45 972.8,4031.31 973,4031.5 973,4043.2 ; IC4.5@1000.49,4045.17 998.52,4043.2 973,4043.2 ; T1.2@2154,3597.82 2219,3662.82 2219,3884.49 2123.49,3980 2030,3980 1990.82,3940.82 C36.1@1990.82,3926 1552,3926 1363,4115 961.61,4115 930,4083.39 C55.1@930,4043.2 ; C55.1@930,4043.2 973,4043.2
  Top Layer w20: v2(871,4045.17) C55.1@928.03,4045.17
  Bottom Layer w20: J101.3@555,2685 345,2895 v2(205,2895) 178.5,2895 128,2945.5 128,3495 256.62,3623.62 256.62,3804.62 v1(321,3869) v2(321,3945) 404,4028 853.83,4028 v2(871,4045.17)
XDS_VCC: C14.1 C15.1 C16.1 C17.1 C18.1 C19.1 C21.1 C22.1 C32.1 C33.1 C41.1 C56.1 IC1.5 IC2.8 IC4.1 J102.1 R31.2 R34.2 R35.2 R41.2 R42.2 R43.2 R45.2 R51.2 R85.2 R91.1 R92.1 TP10.1 XDS1.7 XDS1.8 XDS1.16 XDS1.26 XDS1.28 XDS1.39 XDS1.47 XDS1.51 XDS1.52 XDS1.69 XDS1.79 XDS1.90 XDS1.101 XDS1.113 XDS1.122 XDS2.15 XDS2.16 | length 4652.9
  Top Layer w8: v1(110.33,3666) 129.2,3647.13 R91.1@142,3647.13 ; R92.1@142,3533.76 169.76,3506 226.23,3506 C18.1@254.62,3477.61 ; R51.2@208,3054 235,3027 v1(349,3027) ; C19.1@253.62,3320 C19.1@253.75,3320.13 ; XDS1.122@344.85,3178.39 393.39,3178.39 v1(420,3205) ; XDS1.113@344.85,3320.13 C19.1@253.75,3320.13 ; C17.1@467.5,2912.62 C21.1@524,2912.62 ; XDS1.90@498.39,3631.15 498.39,3571.39 436.1,3509.1 XDS1.101@344.85,3509.1 286.12,3509.1 C18.1@254.62,3477.61 ; XDS1.8@514.14,3024.85 XDS1.7@498.39,3024.85 v1(498.39,2969.61) 524,2944 C21.1@524,2912.62 ; R34.2@580.4,2866.01 533.79,2912.62 C21.1@524,2912.62 ; XDS1.16@640.13,3024.85 640.13,3055.13 650,3065 789,3065 797.61,3056.39 XDS1.26@797.61,3024.85 797.61,2984.39 802.1,2979.9 v1(829.1,2979.9) ; XDS1.79@671.62,3631.15 671.62,3715.06 663,3723.68 663,3779.06 692.94,3809 v1(748,3809) 774,3783 R31.2@774,3772.62 ; XDS1.69@829.1,3631.15 829.1,3672.48 v1(843,3686.38) C14.1@882,3725.38 ; C22.1@897,2912 v1(829.1,2979.9) ; XDS1.39@951.15,3178.39 1082.02,3178.39 R85.2@1110.62,3207 1110.62,3266.26 C15.1@1062.88,3314 ; XDS1.52@951.15,3383.12 XDS1.51@951.15,3367.37 1061.01,3367.37 C16.1@1062.38,3366 1062.88,3365.5 C15.1@1062.88,3314 ; 1172.61,3968.39 1174,3967 ; R45.2@1428.38,3271 1428.38,3278.76 R43.2@1475.62,3326 1500.27,3326 R42.2@1551,3376.73 1551.65,3377.38 R41.2@1613,3377.38 1613,3338 v1(1600,3325) ; IC2.8@1518.56,2800.47 1542.24,2824.15 v1(1565.85,2824.15) ; v1(1607,2664) 1621,2650 1684.72,2650 1700,2665.28 J102.1@1700,2719.88 ; C19.1@253.75,3320.13 254.62,3321 v1(254.62,3385) C18.1@254.62,3477.61 ; v1(829.1,2979.9) XDS1.28@829.1,3024.85 829.1,3142.31 901,3214.21 901,3287 918.38,3304.38 XDS1.47@951.15,3304.38 1053.26,3304.38 C15.1@1062.88,3314
  Top Layer w16: R35.2@1109,3730 1208,3829 v1(1208,3875) 1470.41,3875 C32.1@1539.84,3805.58 1539.84,3682.17 XDS2.15@1544.2,3677.8 XDS2.16@1518.61,3677.8 ; IC4.1@1110.73,3968.39 1172.61,3968.39 ; v2(2200,3125) 2206.62,3131.62 C41.1@2206.62,3179 2220.4,3192.78 IC1.5@2220.4,3226.73
  Bottom Layer w8: v1(1565.85,2824.15) 1598.85,2824.15 1607,2816 v1(1607,2664)
  other v1: 1208,3915 1208,3955
XDS_VCCOUT: C42.1 C43.2 C44.1 IC1.3 L1.2 R36.2 R38.2 R39.2 R40.2 | length 830.6
  Top Layer w8: R36.2@1717,3376.38 1745.38,3348 1903.62,3348 C44.1@1931.62,3376
  Top Layer w25: R39.2@1930,3594.2 R40.2@1930,3539 1930,3408.85 ; C44.1@1931.62,3376 1930,3377.62 1930,3408.85 ; L1.2@2145.06,3493 2145.06,3409.44 C43.2@2145.5,3409 ; IC1.3@2145.6,3335 2145.5,3335.09 C43.2@2145.5,3409 ; 1930,3408.85 1930.15,3409 C43.2@2145.5,3409
XDS_VCCTARGET: C39.1 C40.1 IC1.4 J101.5 R50.2 | length 1787.4
  Top Layer w25: v2(1830,3015) 1931.62,3116.62 R50.2@1931.62,3214 1953.44,3235.81 1997,3235.81 C39.1@1997,3241.38 2130.95,3241.38 IC1.4@2145.6,3226.73
  VCC Layer w25: J101.5@655,2685 833,2863 1678,2863 v2(1830,3015)
pads on no net: FID1.1 FID2.1 FID3.1 IC4.2 IC4.3 IC4.6 IC4.7 IC5.2 IC5.4 IC5.5 J103.6 J103.8 MH1.1 MH2.1 MH3.1 MH4.1 RT1.1S RT1.2S S1. S2. S3. SH-J1.0 SH-J2.0 SH-J3.0 SH-J4.0 SH-J5.0 SH-J6.0 SH-J7.0 SH-J8.0 SH-J9.0 SH-J10.0 SH-J11.0 SH-J12.0 SH-J13.0 SH-J14.0 SH-J15.0 SH-J16.0 SH-J17.0 SH-J18.0 SH-J19.0 SH-J20.0 SH-J21.0 SH-J22.0 SH-J23.0 SH-J24.0 SH-J25.0 U1.1 U1.3 XDS1.2 XDS1.12 XDS1.13 XDS1.14 XDS1.15 XDS1.18 XDS1.19 XDS1.20 XDS1.21 XDS1.22 XDS1.23 XDS1.24 XDS1.25 XDS1.29 XDS1.30 XDS1.31 XDS1.32 XDS1.41 XDS1.43 XDS1.44 XDS1.45 XDS1.46 XDS1.53 XDS1.54 XDS1.56 XDS1.57 XDS1.65 XDS1.67 XDS1.71 XDS1.72 XDS1.73 XDS1.74 XDS1.75 XDS1.76 XDS1.81 XDS1.82 XDS1.83 XDS1.84 XDS1.85 XDS1.86 XDS1.91 XDS1.92 XDS1.102 XDS1.103 XDS1.104 XDS1.105 XDS1.106 XDS1.107 XDS1.108 XDS1.109 XDS1.110 XDS1.111 XDS1.112 XDS1.116 XDS1.117 XDS1.118 XDS1.119 XDS1.121 XDS1.123 XDS1.124 XDS1.125 XDS1.126